# Altium PCB Thrust Stand + Wind Tunnel Controller.PcbDoc (part 1 of 2)
Units mm, origin at the board's own origin, x right, y up, seen from the top; angles counter-clockwise.
Board outline 72 x 57 mm, 4 copper layers (Top Layer, Layer 2 (GND), Layer 3 (GND/POW), Bottom Layer (SIG)), stack 0.346 mm thick; 155 components, 74 nets, 570 pads, 498 vias.
Unrouted connection lines stored in the file: 154.
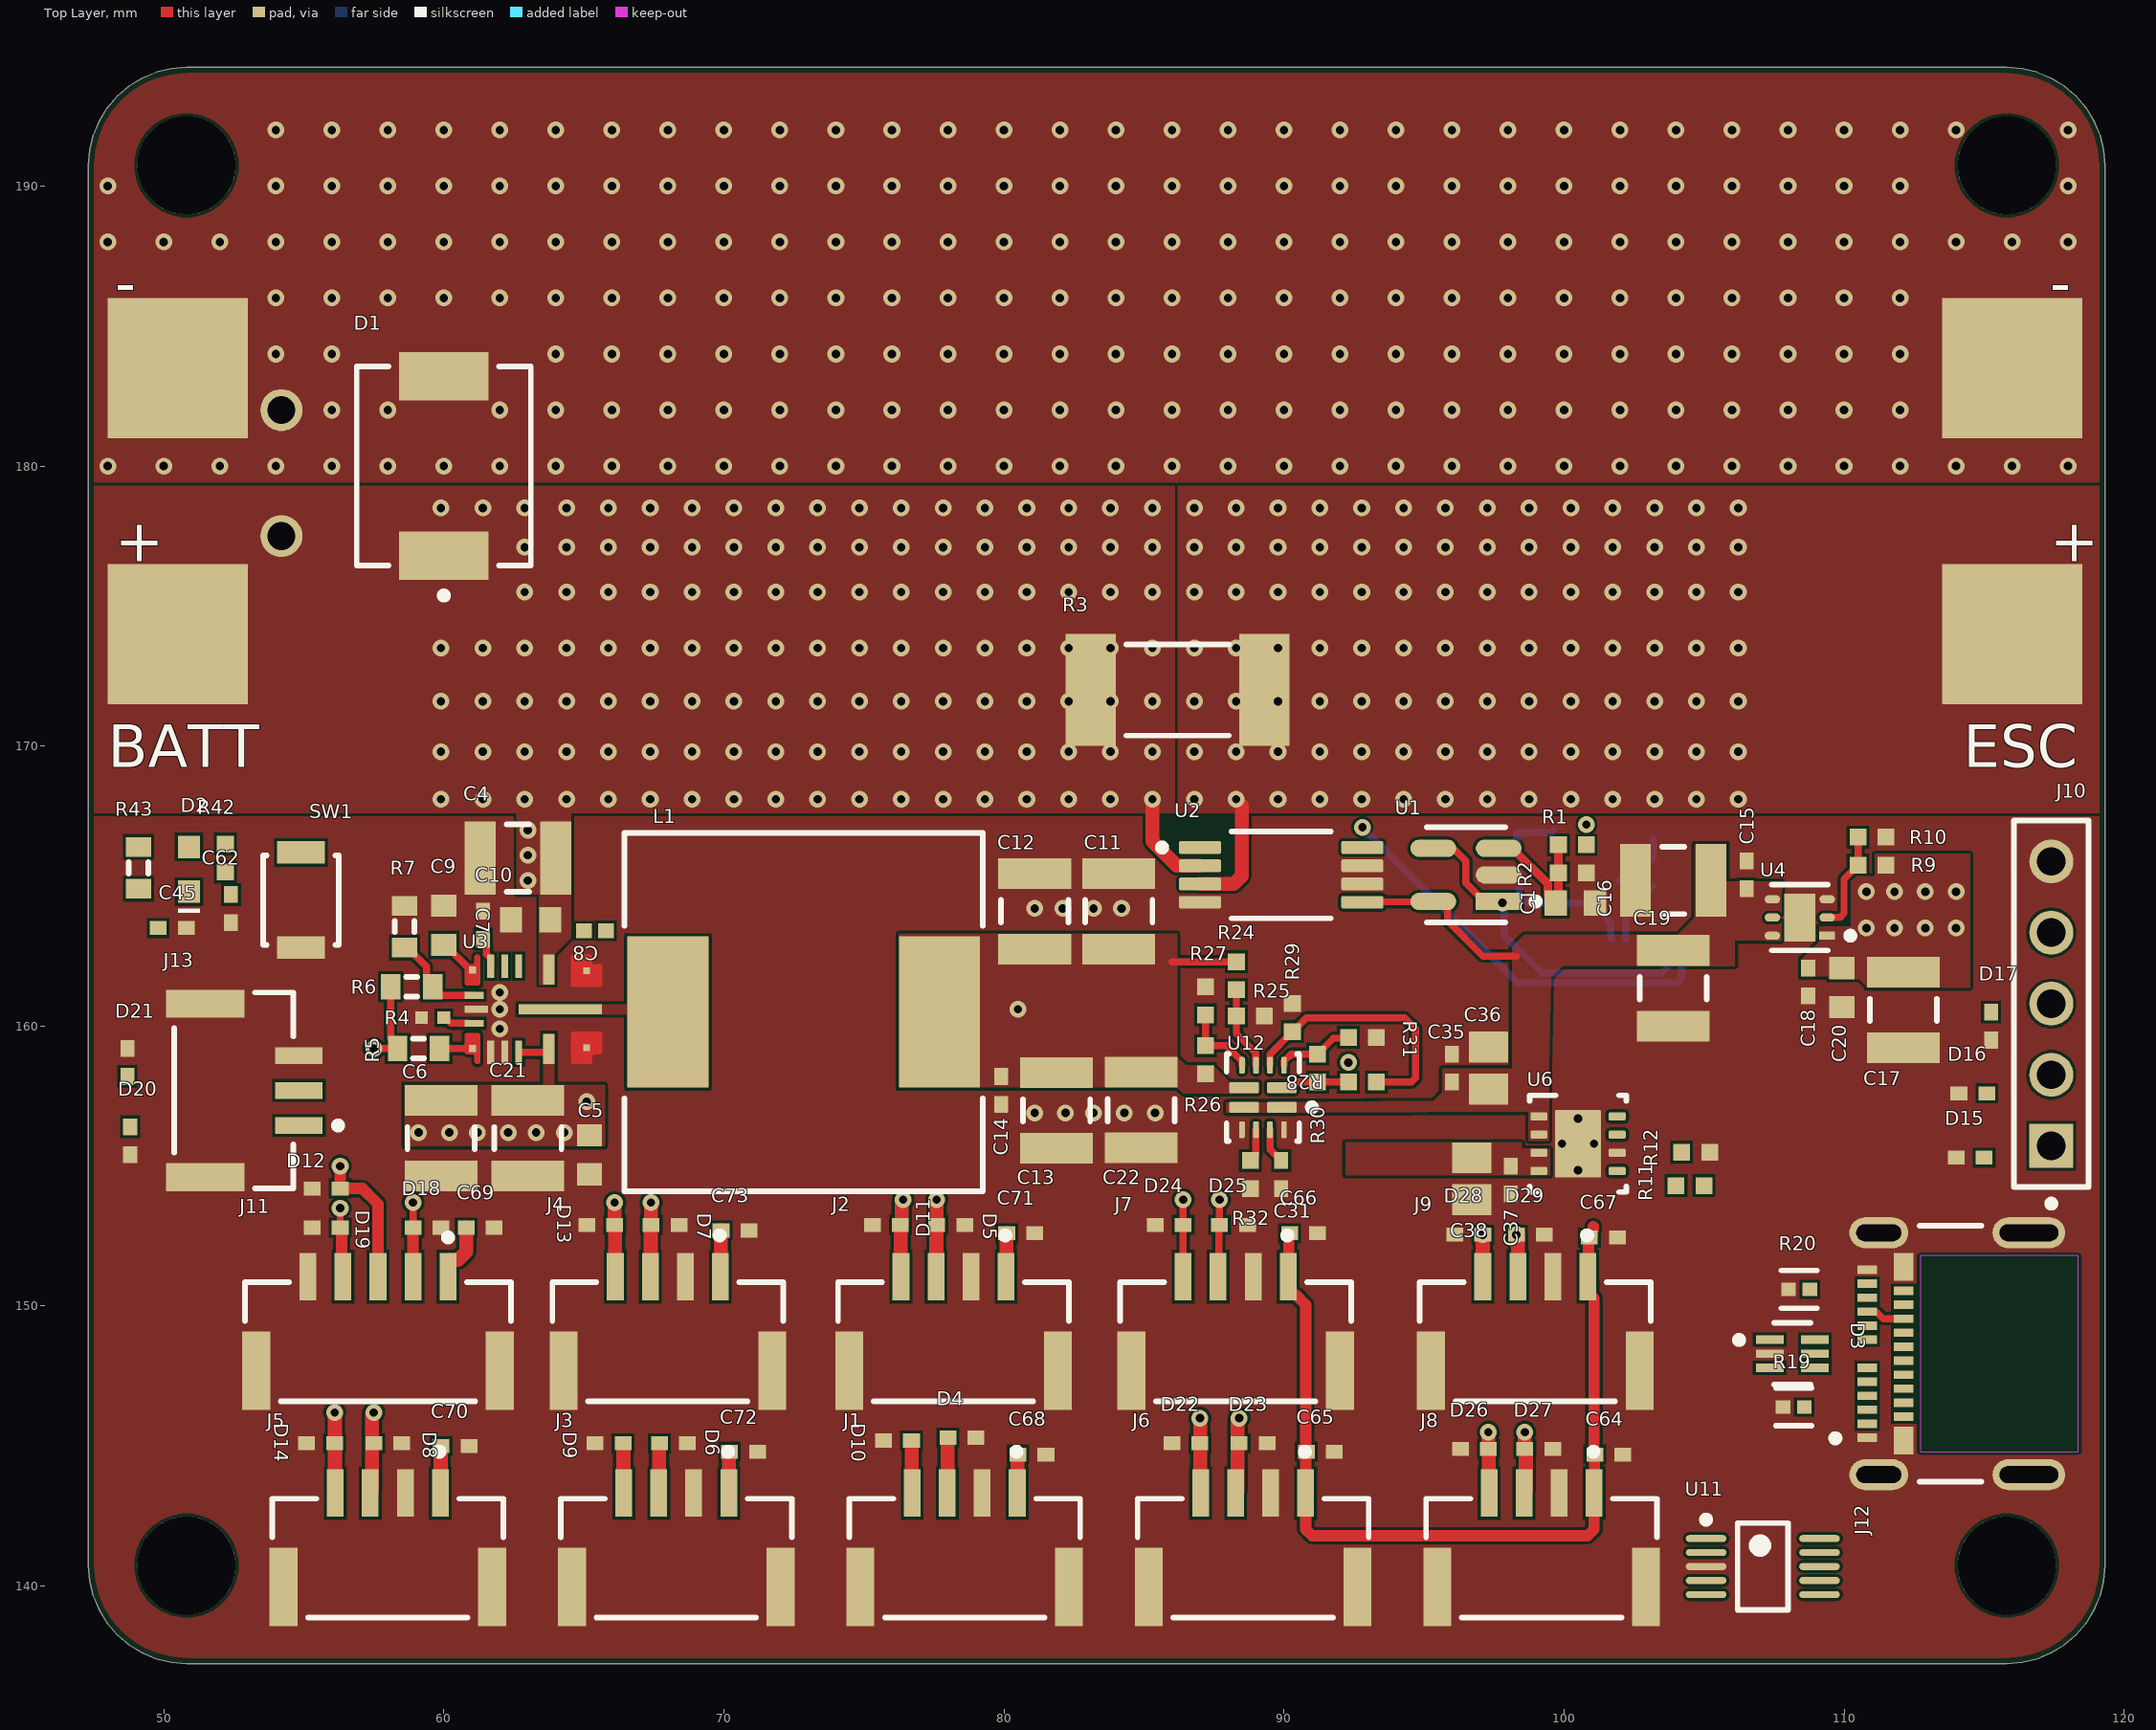
[diagram p0: Top Layer view]
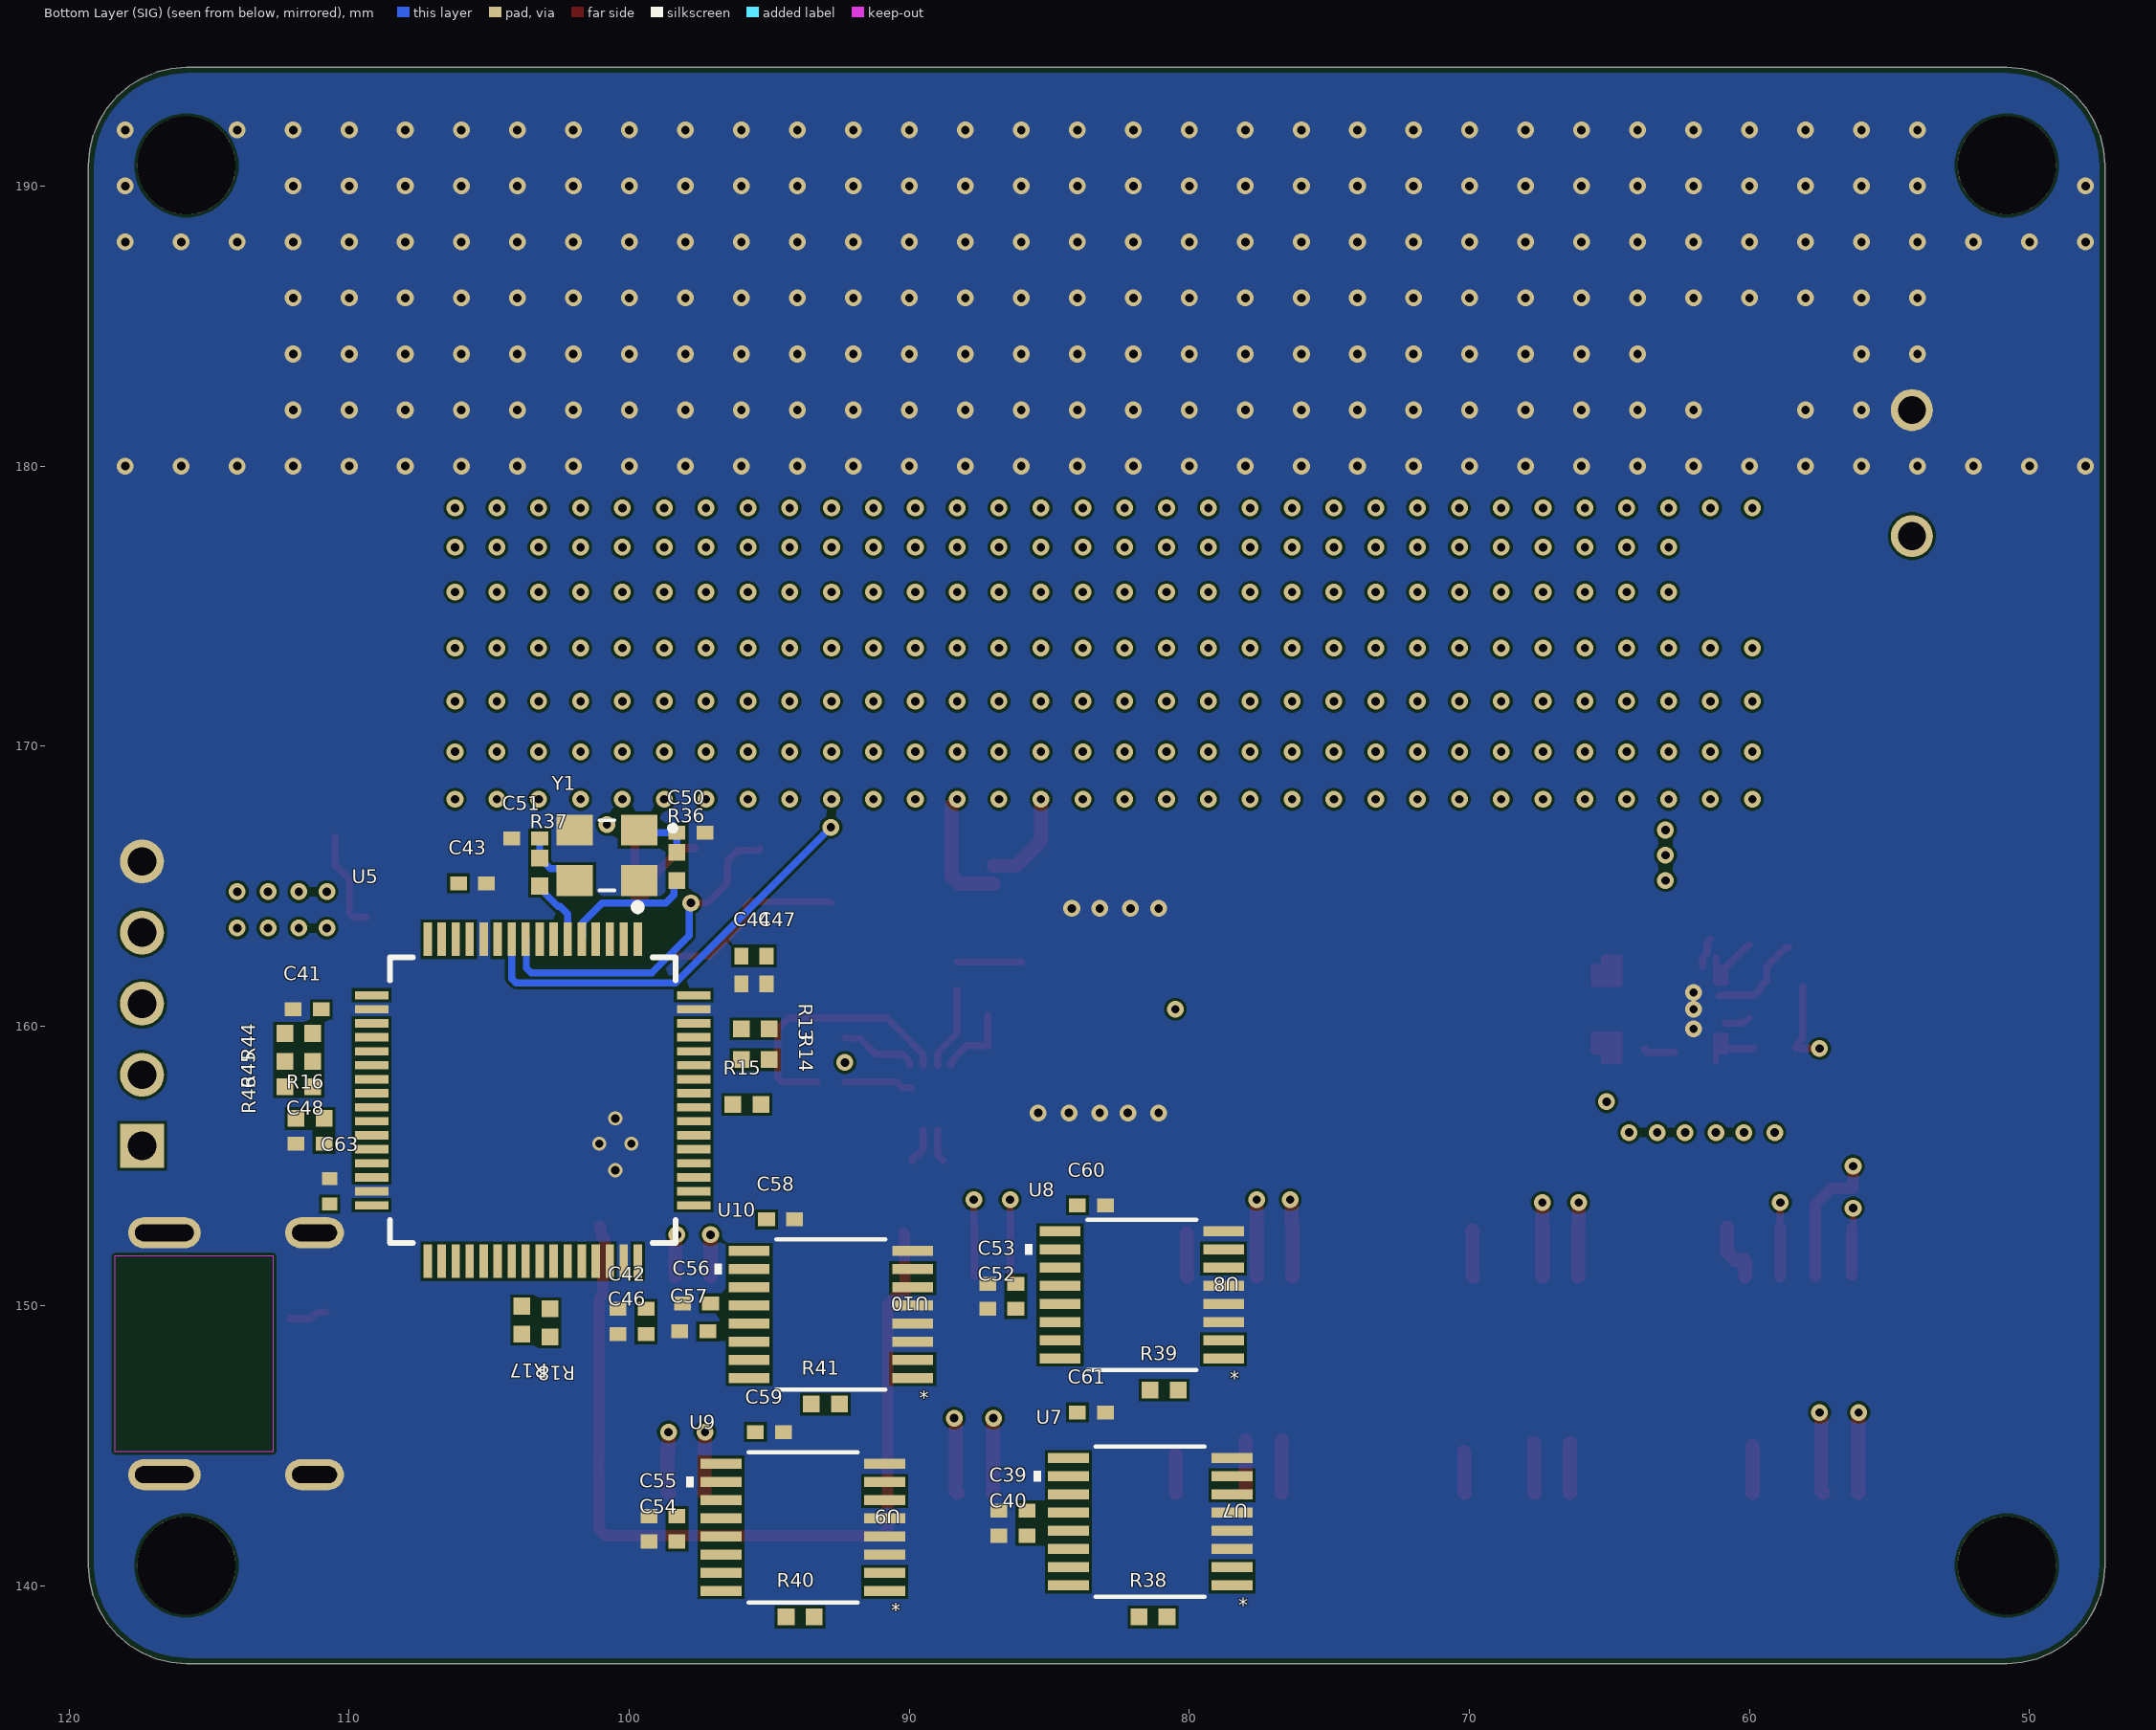
[diagram p1: Bottom Layer (SIG) view, seen from below]
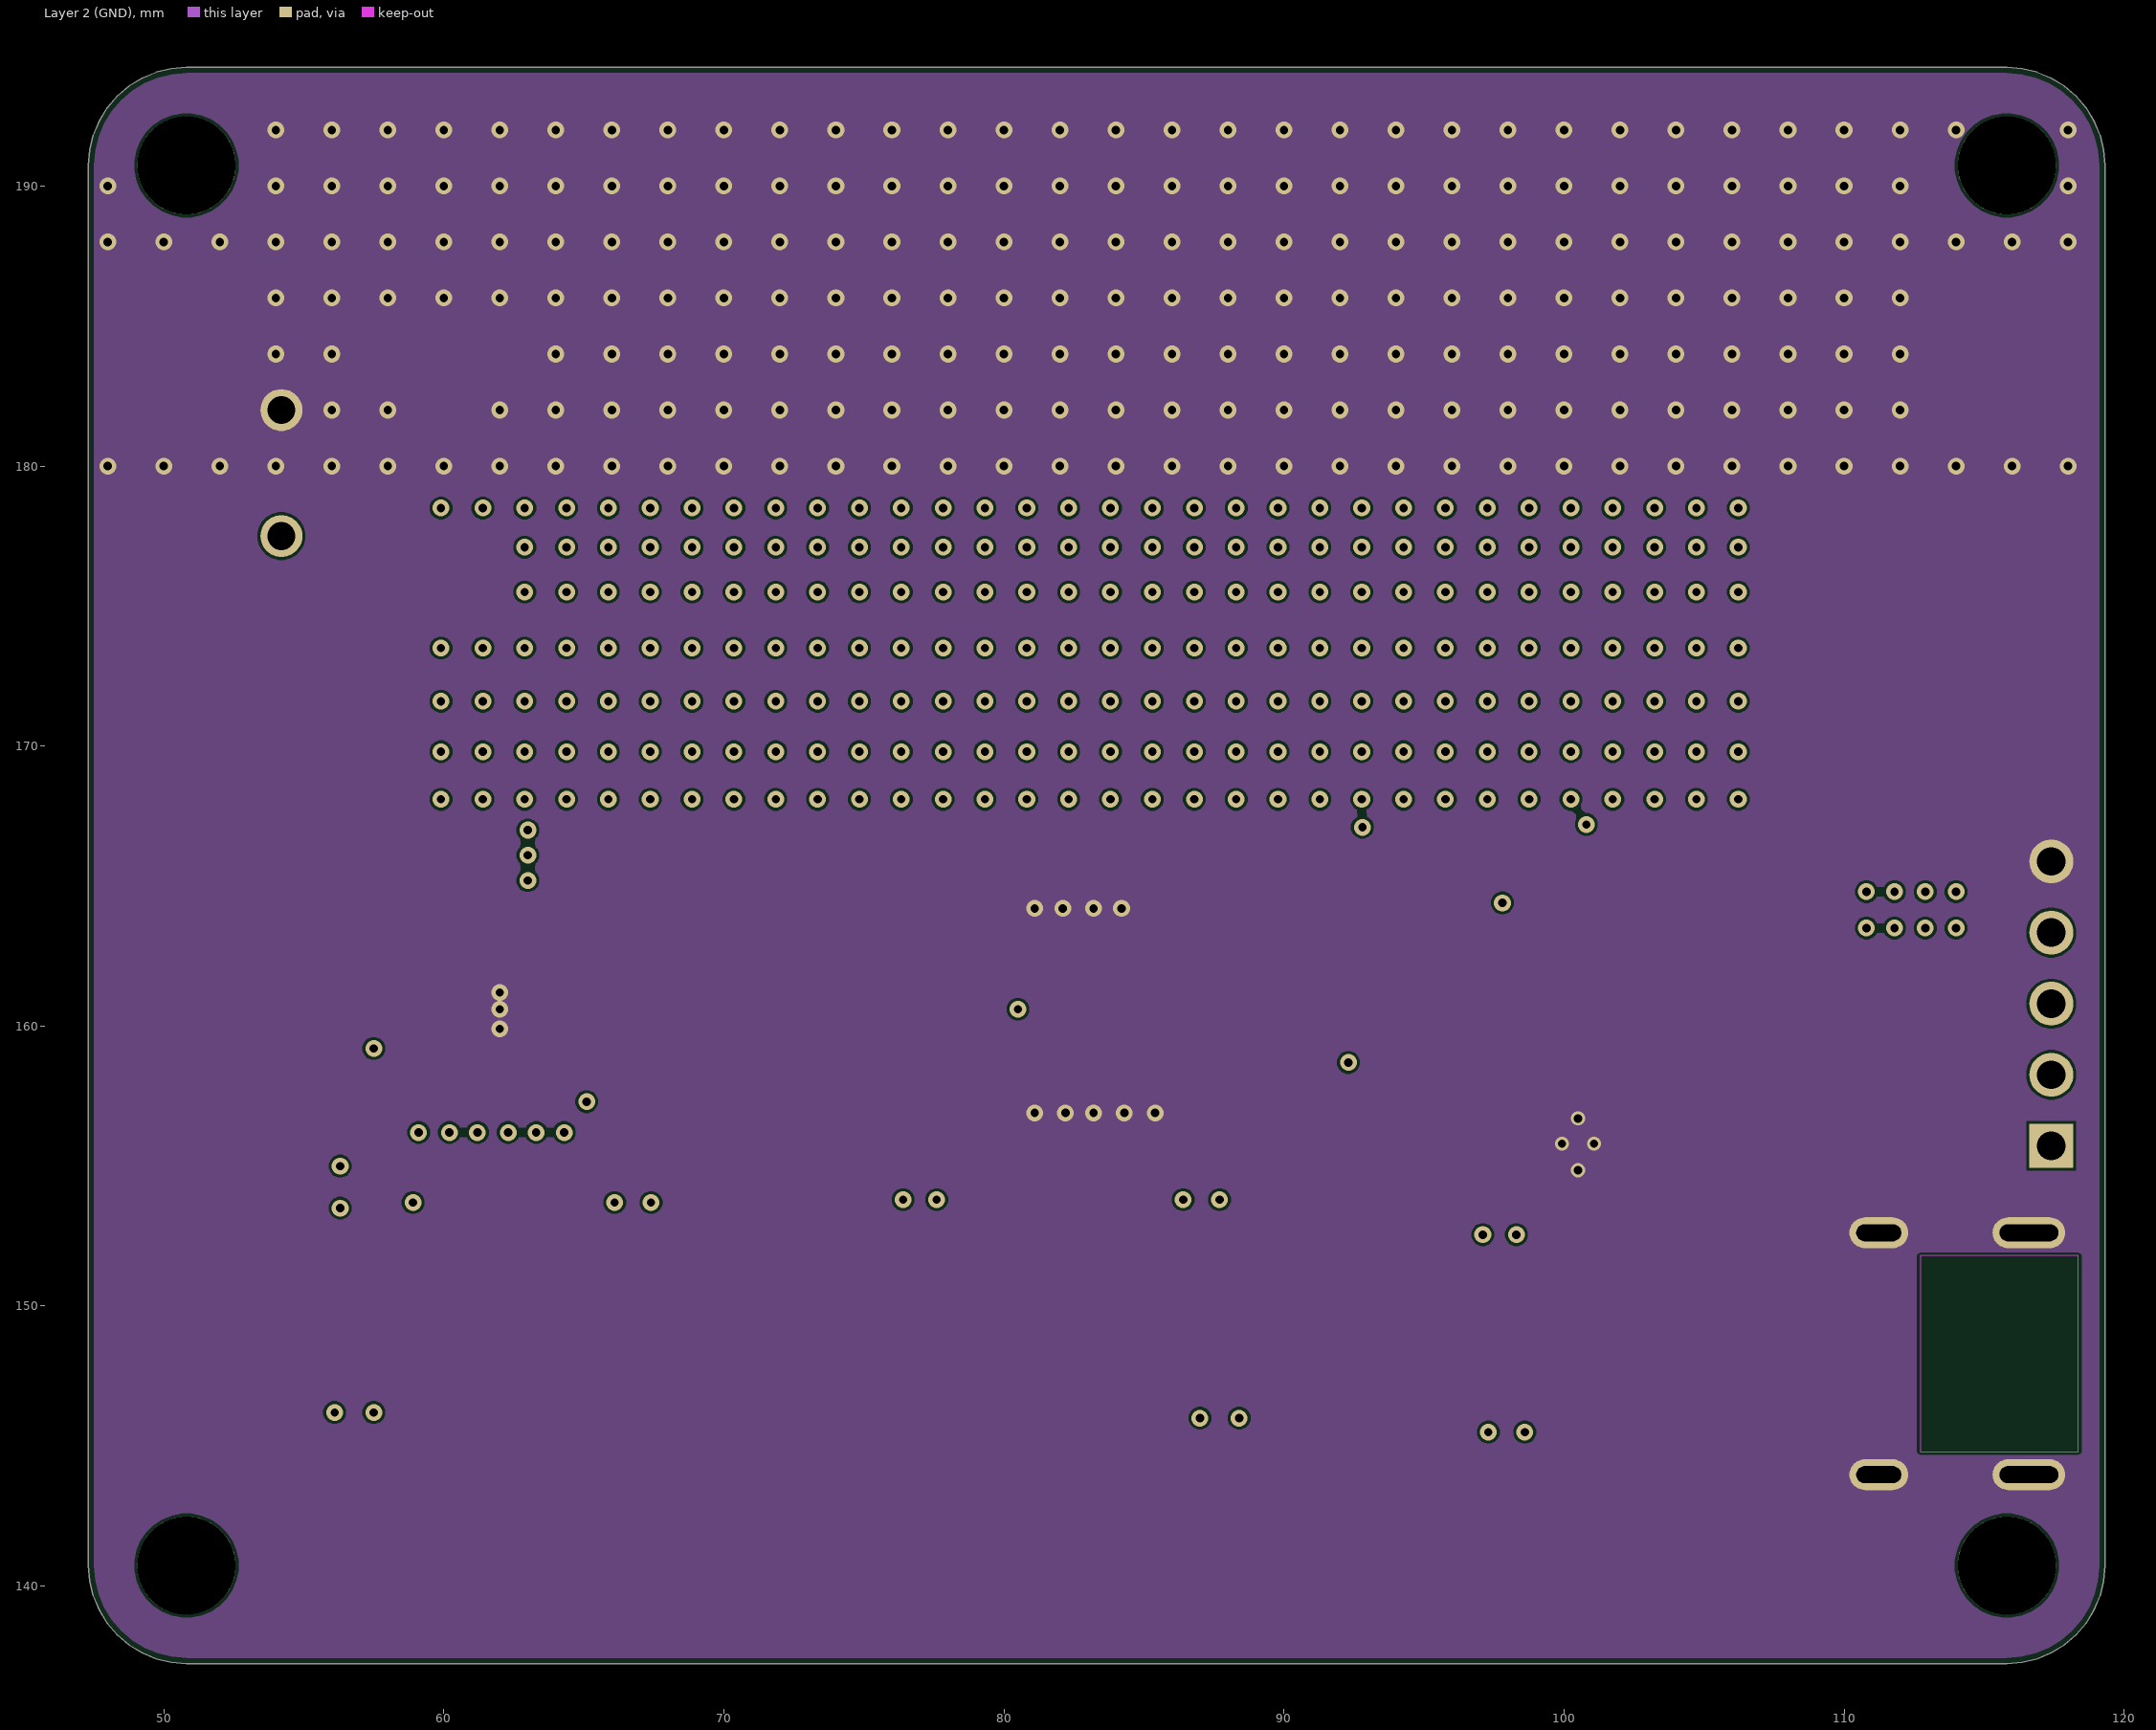
[diagram p2: Layer 2 (GND)]
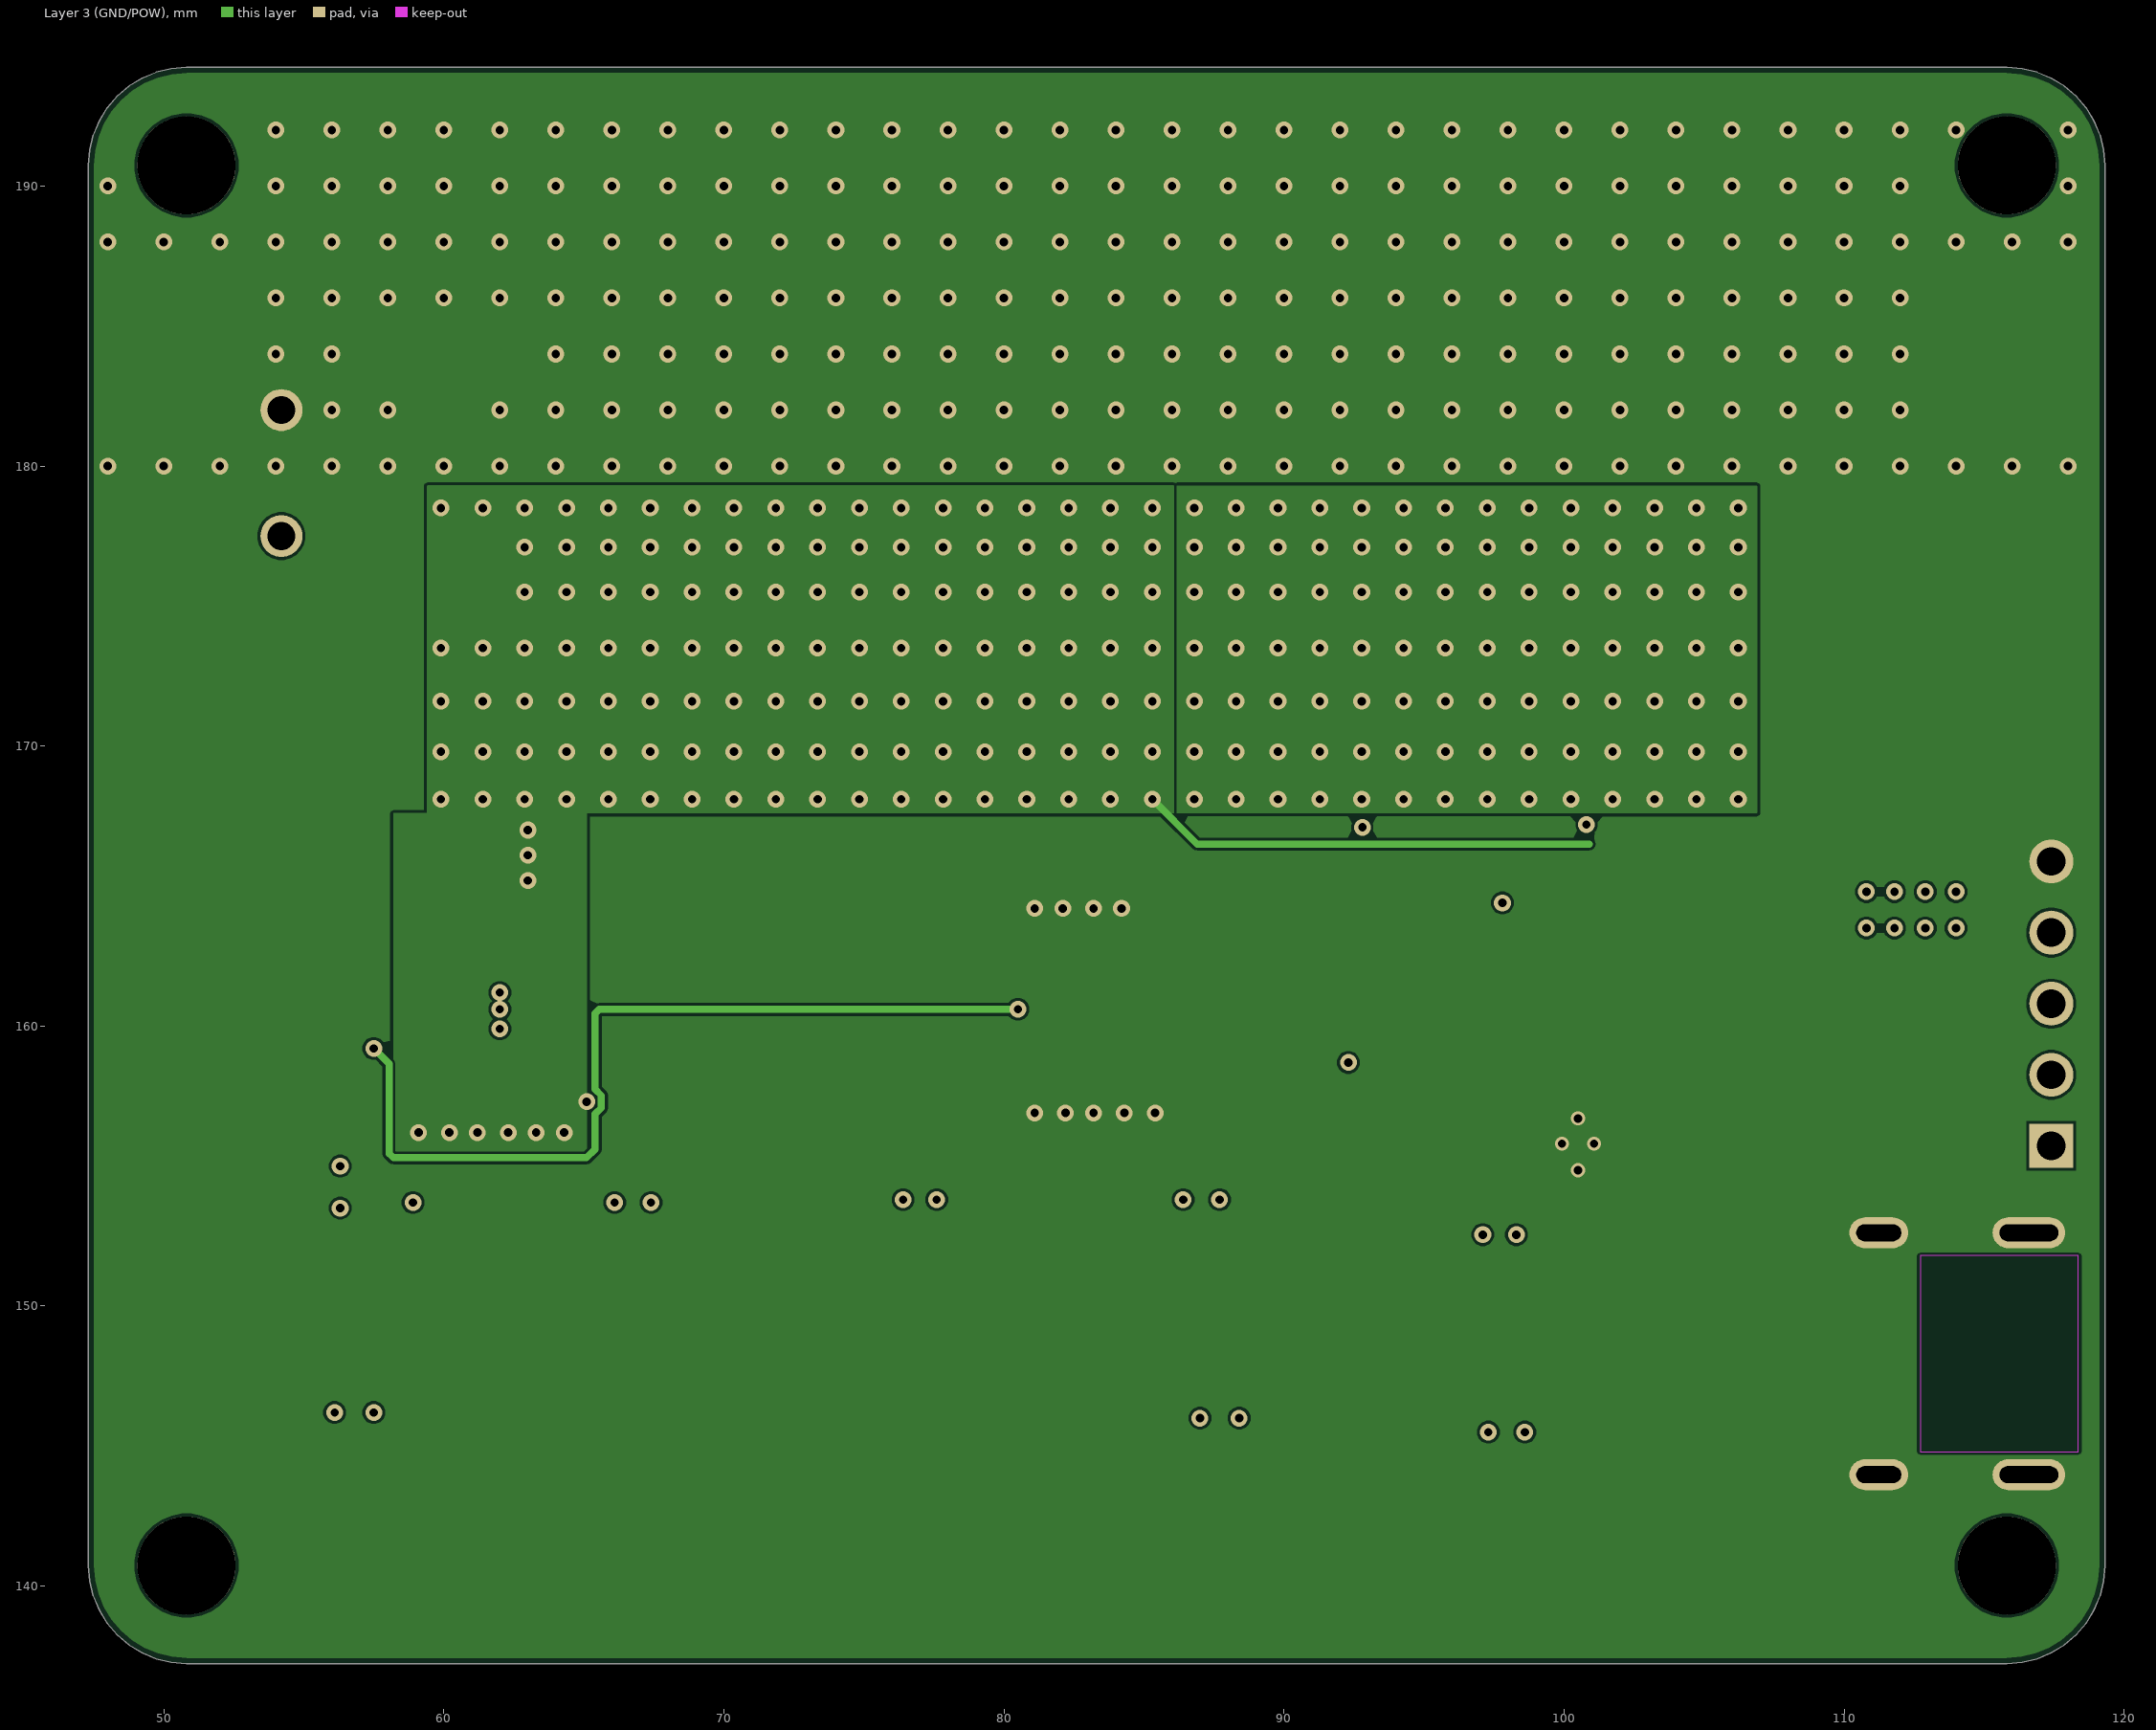
[diagram p3: Layer 3 (GND/POW)]

## Layer stack, top to bottom
Top Solder: solder mask 0.0102, Dk 3.5
Top Layer: signal copper 0.035
Dielectric 2: prepreg 0.0711, PP-006, Dk 4.1
Layer 2 (GND): signal copper 0.035
Dielectric 1: core 0.0635, Core-004, Dk 4.2
Layer 3 (GND/POW): signal copper 0.035
Dielectric 3: prepreg 0.0711, PP-006, Dk 4.1
Bottom Layer (SIG): signal copper 0.035
Bottom Solder: solder mask 0.0102, Dk 3.5

## Board outline
50.812,194.235 50.264,194.192 49.73,194.064 49.223,193.854 48.755,193.567 48.337,193.21 47.98,192.792 47.693,192.324 47.483,191.817 47.355,191.283 47.312,190.735 47.312,140.735 47.355,140.187 47.483,139.653 47.693,139.146 47.98,138.678 48.337,138.26 48.755,137.903 49.223,137.616 49.73,137.406 50.264,137.278 50.812,137.235 115.812,137.235 116.36,137.278 116.894,137.406 117.401,137.616 117.869,137.903 118.287,138.26 118.644,138.678 118.931,139.146 119.141,139.653 119.269,140.187 119.312,140.735 119.312,190.735 119.269,191.283 119.141,191.817 118.931,192.324 118.644,192.792 118.287,193.21 117.869,193.567 117.401,193.854 116.894,194.064 116.36,194.192 115.812,194.235

## Design rules (kind name [scope] priority, off if disabled: settings)
BoardOutlineClearance [All] p1: gap=0.2 ignorepadtopadclearanceinfootprint=FALSE
Clearance [All] p1: gap=0.1 ignorepadtopadclearanceinfootprint=FALSE
DiffPairsRouting [All] p1: maxlimit=0.254 minlimit=0.254 mostfreqgap=0.254 toplayer_minwidth=0.381 toplayer_maxwidth=0.381 toplayer_prefwidth=0.381 midlayer1_minwidth=0.381 midlayer1_maxwidth=0.381 midlayer1_prefwidth=0.381 midlayer2_minwidth=0.381 midlayer2_maxwidth=0.381 midlayer2_prefwidth=0.381 bottomlayer_minwidth=0.381 bottomlayer_maxwidth=0.381 bottomlayer_prefwidth=0.381 maxuncoupledlength=12.7
MinimumSolderMaskSliver [All] p1: minsoldermaskwidth=0.1
PlaneConnect [All] p1: planeconnectstyle=Direct reliefexpansion=0.508 reliefentries=4 reliefconductorwidth=0.254 reliefairgap=0.254
PolygonConnect [All] p1: connectstyle=Direct reliefconductorwidth=0.254 reliefentries=4 polygonreliefangle="90 Angle" airgapwidth=0.254
RoutingVias [All] p1: holewidth=0.711 width=1.27 viastyle="Through Hole" minholewidth=0.711 minwidth=1.27 maxholewidth=0.711 maxwidth=1.27
SolderMaskExpansion [All] p1: expansion=0 istentingtop=FALSE
SupplyNets "Schematic Supply Nets_1" [InNet('GND')] p1: voltage=0.000
SupplyNets "Schematic Supply Nets" [InNet('ESC_OUT')] p2: voltage=0.000
Width [All] p1: maxlimit=1.5 minlimit=0.254 preferedwidth=0.254
27 further rules are at their usual default settings.

## Classes and differential pairs
component class USB: C31 R24 R25 R26 R27 R28 R29 R30 R31 R32 U12
component class 4V3: C35 C36 C37 C38 R11 R12 U6
component class Output: C39 C40 C41 C42 C43 C44 C45 C46 C47 C48 C50 C51 C52 C53 C54 C55 C56 C57 C58 C59 C60 C61 C62 C63 C64 C65 C66 C67 C68 C69 C70 C71 C72 C73 D2 D4 D5 D6 D7 D8 D9 D10 D11 D12 D13 D14 D15 D16 D17 D18 D19 D20 D21 D22 D23 D24 D25 D26 D27 D28 D29 J1 J2 J3 J4 J5 J6 J7 J8 J9 J10 J11 J13 R13 R14 R15 R16 R17 R18 R36 R37 R38 R39 R40 R41 R42 R43 R44 R45 R46 SW1 U5 U7 U8 U9 U10 U11 Y1
component class 5V: "Buck Converter" C4 C5 C6 C7 C8 C9 C10 C11 C12 C13 C14 C21 C22 L1 R4 R5 R6 R7 U3
component class 3V3: C15 C16 C17 C18 C19 C20 R9 R10 U4
component class "BATT IN": C1 D1 R1 R2 R3 U1 U2
differential pair DOUT: +DOUT_P -DOUT_N
differential pair D: +D_P -D_N

## Components (designator, comment, footprint, x,y, rotation, side; value= is the part's Value field where it differs from the comment)
C1 "Cap Semi" 0603_CAPC1608L 100.4,164.4 r180 top value="15 µF"
C4 "10 µF" 1210_CAPC3225L 62.65,166 r180 top
C5 "1 µF" 0603_CAPC1608L 65.2,155.4 r270 top
C6 "10 µF" 1210_CAPC3225L 59.9,156 r270 top
C7 "1 µF" 0603_CAPC1608L 63.1,163.8 r180 top
C8 "GRM155R71A104KA01D" CAPC1005X55X25LL05T10 65.4,163.4 r180 top value=100nF
C9 "1 µF" 0603_CAPC1608L 60,163.6 r90 top
C10 "0.1 µF" 0402_CAPC1005L 61.4,163.6 r90 top
C11 "47 µF" 1210_CAPC3225L 84.1,164.1 r90 top
C12 "47 µF" 1210_CAPC3225L 81.1,164.1 r90 top
C13 "47 µF" 1210_CAPC3225L 81.882,156.99 r270 top
C14 "0.1 µF" 0402_CAPC1005L 79.9,157.7 r270 top
C15 "0.1 µF" 0402_CAPC1005L 106.521,165.4 r270 top
C16 "10 µF" 1210_CAPC3225L 103.9,165.2 r180 top
C17 "10 µF" 1210_CAPC3225L 112.119,160.577 r270 top
C18 "0.1 µF" 0402_CAPC1005L 108.719,161.577 r90 top
C19 "10 µF" 1210_CAPC3225L 103.9,161.35 r270 top
C20 "1 µF" 0603_CAPC1608L 109.919,161.377 r270 top
C21 "10 µF" 1210_CAPC3225L 63,156 r270 top
C22 "47 µF" 1210_CAPC3225L 84.9,157 r270 top
C31 "0.1 µF" 0402_CAPC1005L 89.9,154.7 r270 top
C35 "Cap Semi" 0402_CAPC1005L 96,158.5 r270 top value="100 nF"
C36 "Cap Semi" 0805_CAPC2012L 97.3,158.5 r270 top value="4.7 µF"
C37 "Cap Semi" 0402_CAPC1005L 98.1,154.5 r90 top value="100 nF"
C38 "Cap Semi" 0805_CAPC2012L 96.7,154.55 r90 top value="1 µF"
C39 "Cap Semi" 0402_CAPC1005L 86.3,142.7 r0 bottom value="100 nF"
C40 "Cap Semi" 0402_CAPC1005L 86.3,141.8 r0 bottom value="100 nF"
C41 "Cap Semi" 0402_CAPC1005L 111.5,160.6 r0 bottom value="100 nF"
C42 "Cap Semi" 0402_CAPC1005L 99.9,149.9 r0 bottom value="100 nF"
C43 "Cap Semi" 0402_CAPC1005L 105.6,165.1 r180 bottom value="100 nF"
C44 "Cap Semi" 0402_CAPC1005L 96,162 r270 bottom value="100 nF"
C45 "Cap Semi" 0402_CAPC1005L 50.3,163.5 r0 top value="100 nF"
C46 "Cap Semi" 0402_CAPC1005L 99.9,149 r0 bottom value="4.7 µF"
C47 "Cap Semi" 0402_CAPC1005L 95.1,162 r270 bottom value="1 µF"
C48 "Cap Semi" 0402_CAPC1005L 111.4,155.8 r0 bottom value="2.2 µF"
C50 "Cap Semi" 0402_CAPC1005L 97.8,166.9 r0 bottom value="18 pF"
C51 "Cap Semi" 0402_CAPC1005L 103.7,166.7 r0 bottom value="18 pF"
C52 "Cap Semi" 0402_CAPC1005L 86.7,149.9 r0 bottom value="100 nF"
C53 "Cap Semi" 0402_CAPC1005L 86.7,150.8 r0 bottom value="100 nF"
C54 "Cap Semi" 0402_CAPC1005L 98.8,141.593 r0 bottom value="100 nF"
C55 "Cap Semi" 0402_CAPC1005L 98.8,142.5 r0 bottom value="100 nF"
C56 "Cap Semi" 0402_CAPC1005L 97.6,150.1 r0 bottom value="100 nF"
C57 "Cap Semi" 0402_CAPC1005L 97.7,149.1 r0 bottom value="100 nF"
C58 "Cap Semi" 0402_CAPC1005L 94.6,153.1 r180 bottom value="100 nF"
C59 "Cap Semi" 0402_CAPC1005L 95,145.5 r180 bottom value="100 nF"
C60 "Cap Semi" 0402_CAPC1005L 83.5,153.6 r180 bottom value="100 nF"
C61 "Cap Semi" 0402_CAPC1005L 83.5,146.2 r180 bottom value="100 nF"
C62 "100 nF" 0402_CAPC1005L 52.4,164.2 r90 top
C63 "0.1uF" "IPC C C0402 NO SILK" 110.7,154.1 r270 bottom value=?F
C64 "Cap Semi" 0402_CAPC1005L 101.6,144.7 r0 top value="100 nF"
C65 "Cap Semi" 0402_CAPC1005L 91.3,144.8 r0 top value="100 nF"
C66 "Cap Semi" 0402_CAPC1005L 90.7,152.6 r0 top value="100 nF"
C67 "Cap Semi" 0402_CAPC1005L 101.406,152.45 r0 top value="100 nF"
C68 "Cap Semi" 0402_CAPC1005L 81,144.7 r0 top value="100 nF"
C69 "Cap Semi" 0402_CAPC1005L 61.3,152.8 r0 top value="100 nF"
C70 "Cap Semi" 0402_CAPC1005L 60.4,145 r0 top value="100 nF"
C71 "Cap Semi" 0402_CAPC1005L 80.6,152.6 r0 top value="100 nF"
C72 "Cap Semi" 0402_CAPC1005L 70.7,144.8 r0 top value="100 nF"
C73 "Cap Semi" 0402_CAPC1005L 70.4,152.7 r0 top value="100 nF"
D1 "1.5SMC30AHE3_A/H" FP-SMC-MFG 60,180 r90 top
D2 "150060VS75000" WL-SMCW_0603_150060xx75000 50.9,165.6 r90 top
D3 "USBLC6-2P6" FP-SOT-666-MFG 108.15,148.3 r0 top
D4 "ESD321DPYR" FP-DPY0002A-MFG 78.5,145.3 r0 top value=0.9pF
D5 "ESD321DPYR" FP-DPY0002A-MFG 78.1,152.9 r0 top value=0.9pF
D6 "ESD321DPYR" FP-DPY0002A-MFG 68.2,145.1 r0 top value=0.9pF
D7 "ESD321DPYR" FP-DPY0002A-MFG 67.9,152.9 r0 top value=0.9pF
D8 "ESD321DPYR" FP-DPY0002A-MFG 58,145.1 r0 top value=0.9pF
D9 "ESD321DPYR" FP-DPY0002A-MFG 65.9,145.1 r180 top value=0.9pF
D10 "ESD321DPYR" FP-DPY0002A-MFG 76.2,145.2 r180 top value=0.9pF
D11 "ESD321DPYR" FP-DPY0002A-MFG 75.8,152.9 r180 top value=0.9pF
D12 "ESD321DPYR" FP-DPY0002A-MFG 55.8,154.2 r180 top value=0.9pF
D13 "ESD321DPYR" FP-DPY0002A-MFG 65.6,152.9 r180 top value=0.9pF
D14 "ESD321DPYR" FP-DPY0002A-MFG 55.6,145.1 r180 top value=0.9pF
D15 "ESD321DPYR" FP-DPY0002A-MFG 114.5,155.3 r180 top value=0.9pF
D16 "ESD321DPYR" FP-DPY0002A-MFG 114.6,157.6 r180 top value=0.9pF
D17 "ESD321DPYR" FP-DPY0002A-MFG 115.25,160 r270 top value=0.9pF
D18 "ESD321DPYR" FP-DPY0002A-MFG 59.4,152.8 r0 top value=0.9pF
D19 "ESD321DPYR" FP-DPY0002A-MFG 55.8,152.8 r180 top value=0.9pF
D20 "ESD321DPYR" FP-DPY0002A-MFG 48.8,155.9 r270 top value=0.9pF
D21 "ESD321DPYR" FP-DPY0002A-MFG 48.7,158.7 r90 top value=0.9pF
D22 "SP0402U-ULC-01ETG" FP-DPY0002A-MFG 86.5,145.1 r180 top value=0.9pF
D23 "SP0402U-ULC-01ETG" FP-DPY0002A-MFG 88.9,145.1 r0 top value=0.9pF
D24 "SP0402U-ULC-01ETG" FP-DPY0002A-MFG 85.9,152.9 r180 top value=0.9pF
D25 "SP0402U-ULC-01ETG" FP-DPY0002A-MFG 88.2,152.9 r0 top value=0.9pF
D26 "SP0402U-ULC-01ETG" FP-DPY0002A-MFG 96.8,144.9 r180 top value=0.9pF
D27 "SP0402U-ULC-01ETG" FP-DPY0002A-MFG 99.1,144.9 r0 top value=0.9pF
D28 "SP0402U-ULC-01ETG" FP-DPY0002A-MFG 96.6,152.55 r180 top value=0.9pF
D29 "SP0402U-ULC-01ETG" FP-DPY0002A-MFG 98.8,152.55 r0 top value=0.9pF
J1 "BM04B-GHS-TBT(LF)(SN)" FP-BM04B-GHS-TBT_LF_SN-MFG 78.6,141 r0 top
J2 "BM04B-GHS-TBT(LF)(SN)" FP-BM04B-GHS-TBT_LF_SN-MFG 78.2,148.725 r0 top
J3 "BM04B-GHS-TBT(LF)(SN)" FP-BM04B-GHS-TBT_LF_SN-MFG 68.3,141 r0 top
J4 "BM04B-GHS-TBT(LF)(SN)" FP-BM04B-GHS-TBT_LF_SN-MFG 68,148.725 r0 top
J5 "BM04B-GHS-TBT(LF)(SN)" FP-BM04B-GHS-TBT_LF_SN-MFG 58,141 r0 top
J6 "BM04B-GHS-TBT(LF)(SN)" FP-BM04B-GHS-TBT_LF_SN-MFG 88.9,141 r0 top
J7 "BM04B-GHS-TBT(LF)(SN)" FP-BM04B-GHS-TBT_LF_SN-MFG 88.275,148.725 r0 top
J8 "BM04B-GHS-TBT(LF)(SN)" FP-BM04B-GHS-TBT_LF_SN-MFG 99.2,141 r0 top
J9 "BM04B-GHS-TBT(LF)(SN)" FP-BM04B-GHS-TBT_LF_SN-MFG 98.975,148.725 r0 top
J10 "TSW-105-22-G-S" FP-TSW-105-22-G-S-MFG 117.4,160.8 r90 top
J11 "BM05B-GHS-TBT (LF)(SN)(N)" FP-BM05B-GHS-TBT_LF_SN-MFG 57.65,148.725 r0 top
J12 "1054500101" FP-1054500101-MFG 114.6,148.3 r90 top
J13 "BM03B-GHS-TBT (LF)(SN)(N)" FP-BM03B-GHS-TBT_LF_SN-MFG 52.5,157.7 r270 top
L1 "SRR1260-150M" FP-SRR1260-MFG 72.85,160.5 r0 top value=15uH
R1 "Res Semi" 0402_RESC1005L 100.3,166.476 r0 top value=75k
R2 "Res Semi" 0402_RESC1005L 100.3,165.476 r180 top value=15k
R3 "SCMM2512S5-R001F" FP-AC2512-MFG 86.2,172 r0 top value=1mΩ
R4 "CRCW040252K3FKED" RESC1005X40X25LL05T05 59.6,160.3 r180 top
R5 "Res Semi" 0603_RESC1608L 59.1,159.2 r0 top value="100 kΩ"
R6 "Res Semi" 0603_RESC1608L 58.85,161.4 r180 top value="100 kΩ"
R7 "Res Semi" 0603_RESC1608L 58.6,163.55 r270 top value="24.9 kΩ"
R9 "Res Semi" 0402_RESC1005L 111,165.75 r0 top value="500 kΩ"
R10 "Res Semi" 0402_RESC1005L 111,166.75 r180 top value="160 kΩ"
R11 "Res Semi" 0402_RESC1005L 104.5,154.3 r0 top value="75.6 kΩ"
R12 "Res Semi" 0402_RESC1005L 104.7,155.5 r180 top value="30.1 kΩ"
R13 "Res Semi" 0402_RESC1005L 95.5,159.9 r180 bottom value=3.3k
R14 "Res Semi" 0402_RESC1005L 95.5,158.8 r180 bottom value=3.3k
R15 "Res Semi" 0402_RESC1005L 95.8,157.2 r180 bottom value=3.3k
R16 "Res Semi" 0402_RESC1005L 111.4,156.7 r0 bottom value=3.3k
R17 "Res Semi" 0402_RESC1005L 103.837,149.5 r270 bottom value=3.3k
R18 "Res Semi" 0402_RESC1005L 102.837,149.4 r270 bottom value=3.3k
R19 "MCWR04X5101FTL" FP-MCWR04-IPC_C 108.2,146.4 r180 top value=5.1kΩ
R20 "MCWR04X5101FTL" FP-MCWR04-IPC_C 108.4,150.6 r180 top value=5.1kΩ
R24 "Res Semi" 0402_RESC1005L 88.3,161.8 r90 top value="10 kΩ"
R25 "Res Semi" 0402_RESC1005L 88.8,160.357 r180 top value="5 kΩ"
R26 "Res Semi" 0402_RESC1005L 87.2,158.8 r270 top value="12 kΩ"
R27 "Res Semi" 0402_RESC1005L 87.2,160.9 r270 top value="5 kΩ"
R28 "Res Semi" 0402_RESC1005L 92.8,158 r180 top value="20 kΩ"
R29 "Res Semi" 0402_RESC1005L 90.3,160.3 r270 top value="5 kΩ"
R30 "Res Semi" 0402_RESC1005L 91.2,158.5 r270 top value="12 kΩ"
R31 "Res Semi" 0402_RESC1005L 92.8,159.6 r180 top value="4 kΩ"
R32 "Res Semi" 0402_RESC1005L 88.8,154.7 r90 top value="35.7 kΩ"
R36 "Res Semi" 0402_RESC1005L 98.3,165.7 r90 bottom value="0 Ω"
R37 "Res Semi" 0402_RESC1005L 103.2,165.5 r90 bottom value="220 Ω"
R38 "Res Semi" 0402_RESC1005L 81.3,138.9 r0 bottom value="10 kΩ"
R39 "Res Semi" 0402_RESC1005L 80.9,147 r0 bottom value="10 kΩ"
R40 "Res Semi" 0402_RESC1005L 93.9,138.9 r0 bottom value="10 kΩ"
R41 "Res Semi" 0402_RESC1005L 93,146.5 r0 bottom value="10 kΩ"
R42 "Res Semi" 0402_RESC1005L 52.2,166 r90 top value="10 kΩ"
R43 "Res Semi" 0603_RESC1608L 49.1,165.65 r90 top value="65 Ω"
R44 "Res Semi" 0402_RESC1005L 111.8,159.739 r0 bottom value="22 Ω"
R45 "Res Semi" 0402_RESC1005L 111.8,158.739 r0 bottom value="22 Ω"
R46 "Res Semi" 0402_RESC1005L 111.8,157.839 r0 bottom value="22 Ω"
SW1 "B3U-1000P" FP-B3U-1000P-MFG 54.9,164.5 r270 top
U1 "MCP6001T-I/OT" FP-C04-091-OT-IPC_A 96.5,165.4 r180 top
U2 "INA240A2PWR" FP-PW0008A-MFG 89.9,165.4 r0 top
U3 "LM61480RPHR" RPH0016A 63.2,160.6 r270 top
U4 "TLV76701DRVR" FP-DRV0006A-IPC_C 108.419,163.877 r180 top
U5 "STM32F446RET6" FP-LQFP64-5W-MFG 103.45,157.35 r270 bottom
U6 "TPS79501QDRBRQ1" DRB0008B_V 100.5,155.8 r0 top
U7 "ADS1220IPW" PW16 81.4,142.3 r0 bottom
U8 "ADS1220IPW" PW16 81.7,150.4 r0 bottom
U9 "ADS1220IPW" PW16 93.8,142.1 r0 bottom
U10 "ADS1220IPW" PW16 92.8,149.7 r0 bottom
U11 "CH340E" MSOP-UN10_L 107.1,140.7 r0 top
U12 "TPS2121RUXR" FP-RUX0012A-MFG 89.25,157.45 r180 top
Y1 "ECS-80-12-33-JGN-TR" XTAL_ECS-240-8-33-AGN-TR 100.8,166.1 r0 bottom

## Footprints (in the part's own frame and the unit in brackets; to place one, negate y for a bottom-side part, rotate by r counter-clockwise, add the part's x,y. Pads: shape width x height; smd on the part's side, far side on the other; paste and mask are expansions set on the pad)
0402_CAPC1005L [mm] "Chip Capacitor, Body 1.0x0.5mm, IPC High Density"
  rect 0.6x0.5 smd: 1(-0.5,0) 2(0.5,0)
  body extent -0.55,-0.3 0.55,0.3, height 0.5
0402_RESC1005L [mm] "Chip Resistor, Body 1.1x0.5mm, IPC High Density"
  rect 0.6x0.6 smd: 1(-0.5,0) 2(0.5,0)
  body extent -0.55,-0.3 0.55,0.3, height 0.32
0603_CAPC1608L [mm] "Chip Capacitor, Body 1.6x0.8mm, IPC High Density"
  rect 0.8x0.9 smd: 1(-0.7,0) 2(0.7,0)
  body extent -0.87,-0.48 0.87,0.48, height 0.8
0603_RESC1608L [mm] "Chip Resistor, Body 1.6x0.8mm, IPC High Density"
  rect 0.7x0.9 smd: 1(-0.75,0) 2(0.75,0)
  silkscreen extent -0.2,-0.35 0.2,0.35, body extent -0.85,-0.48 0.85,0.48, height 0.9
0805_CAPC2012L [mm] "Chip Capacitor, Body 2.0x1.3mm, IPC High Density"
  rect 1.1x1.4 smd: 1(-0.75,0) 2(0.75,0)
  body extent -1.1,-0.72 1.1,0.72, height 1.25
1210_CAPC3225L [mm] "Chip Capacitor, Body 3.2x2.5mm, IPC High Density"
  rect 1.1x2.6 smd: 1(-1.35,0) 2(1.35,0)
  silkscreen extent -0.4,-1.2 0.4,1.2, body extent -1.7,-1.35 1.7,1.35, height 1.5
CAPC1005X55X25LL05T10 [mm] "Chip Capacitor, 2-Leads, Body 1.05x0.55mm, IPC High Density"
  rect 0.56x0.52 smd: 1(-0.39,0) 2(0.39,0)
  body extent -0.53,-0.28 0.53,0.28, height 0.55
DRB0008B_V [mm] "SON, 8-Leads, Body 3x3mm, Pitch 0.65mm, Thermal Pad 2.4x1.65mm, TI Recommended"
  rrect33% 0.6x0.3 smd: 1(-1.4,0.975) 2(-1.4,0.325) 3(-1.4,-0.325) 4(-1.4,-0.975) 5(1.4,-0.975) 6(1.4,-0.325) 7(1.4,0.325) 8(1.4,0.975)
  rrect6% 1.65x2.4 smd paste-1.2: 9(0,0)
  silkscreen extent -1.73,-1.73 1.73,1.73, body extent -1.5,-1.5 1.5,1.5, height 0.96
FP-1054500101-MFG [mm]
  rrect100% 1.1x2.1 hole 1.6 slot 0.6 at 0 deg paste-2539.97 mask+0: 1(-4.32,3.36) 2(4.32,3.36)
  rrect100% 1.1x2.6 hole 2.1 slot 0.6 at 0 deg paste-2539.97 mask+0: 3(-4.32,-2) 4(4.32,-2)
  rect 0.3x0.7 smd paste+0 mask+0: A1(-3,3.77) A2(-2.5,3.77) A3(-2,3.77) A4(-1.5,3.77) A5(-1,3.77) A6(-0.5,3.77) A7(0.5,3.77) A8(1,3.77) A9(1.5,3.77) A10(2,3.77) A11(2.5,3.77) A12(3,3.77) B2(2.25,2.47) B3(1.75,2.47) B4(1.25,2.47) B5(0.75,2.47) B6(0.25,2.47) B7(-0.25,2.47) B8(-0.75,2.47) B9(-1.25,2.47) B10(-1.75,2.47) B11(-2.25,2.47)
  rect 1x0.7 smd paste+0 mask+0: B1(3.1,2.47) B12(-3.1,2.47)
  Keep-Out Layer region: -3.5,-3.77 3.5,-3.77 3.5,1.88 -3.5,1.88
  silkscreen extent -4.57,-0.3 4.57,5.03
FP-AC2512-MFG [mm]
  rect 1.8x4 smd paste+0 mask+0: 1(-3.1,0) 2(3.1,0)
  silkscreen extent -1.83,-1.63 1.83,1.63, body extent -4.1,-2.1 4.1,2.1, height 0.25
FP-B3U-1000P-MFG [mm]
  rect 0.8x1.7 smd paste+0 mask+0: 1(-1.7,0) 2(1.7,0)
  silkscreen extent -1.6,-1.35 1.6,1.35, body extent -2,-1.26 2,1.24, height 1.6
FP-BM03B-GHS-TBT_LF_SN-MFG [mm]
  rect 0.6x1.7 smd paste+0 mask+0: 1(1.25,2.325) 2(0,2.325) 3(-1.25,2.325)
  rect 1x2.8 smd paste+0 mask+0: 4(-3.1,-1.025) 5(3.1,-1.025)
  silkscreen extent -3.5,-2.12 3.5,3.85, body extent -3.7,-2.52 3.7,3.27, height 0.25
FP-BM04B-GHS-TBT_LF_SN-MFG [mm]
  rect 0.6x1.7 smd paste+0 mask+0: 1(1.875,2.325) 2(0.625,2.325) 3(-0.625,2.325) 4(-1.875,2.325)
  rect 1x2.8 smd paste+0 mask+0: 5(-3.725,-1.025) 6(3.725,-1.025)
  silkscreen extent -4.13,-2.12 4.13,3.92, body extent -4.33,-2.52 4.33,3.27, height 0.25
FP-BM05B-GHS-TBT_LF_SN-MFG [mm]
  rect 0.6x1.7 smd paste+0 mask+0: 1(2.5,2.325) 2(1.25,2.325) 3(0,2.325) 4(-1.25,2.325) 5(-2.5,2.325)
  rect 1x2.8 smd paste+0 mask+0: 6(-4.35,-1.025) 7(4.35,-1.025)
  silkscreen extent -4.75,-2.12 4.75,3.85, body extent -4.95,-2.52 4.95,3.27, height 0.25
FP-C04-091-OT-IPC_A [mil]
  rect 64.5x24.33 smd paste+0 mask+0: 1(-45.91,37.4)
  rrect100% 64.5x24.33 smd paste+0 mask+0: 2(-45.91,0) 3(-45.91,-37.4) 4(45.91,-37.4) 5(45.91,37.4)
  silkscreen extent -103,-67 55,67
FP-DPY0002A-MFG [mm]
  rect 0.6x0.5 smd paste+0 mask+0: 1(-0.5,0) 2(0.5,0)
  body extent -0.9,-0.45 0.9,0.45, height 0.25
FP-DRV0006A-IPC_C [mm]
  rect 0.556x0.292 smd paste+0 mask+0: 1(-0.978,0.65)
  rrect100% 0.556x0.292 smd paste+0 mask+0: 2(-0.978,0) 3(-0.978,-0.65) 4(0.978,-0.65) 5(0.978,0) 6(0.978,0.65)
  rect 1.1x1.7 smd paste-1000 mask+0: 7(0,0)
  silkscreen extent -1.93,-1.17 1,1.17, body extent -1.36,-1.1 1.36,1.1, height 0.25
FP-LQFP64-5W-MFG [mm]
  rect 1.2x0.3 smd paste+0 mask+0: 1(-5.75,3.75) 2(-5.75,3.25) 3(-5.75,2.75) 4(-5.75,2.25) 5(-5.75,1.75) 6(-5.75,1.25) 7(-5.75,0.75) 8(-5.75,0.25) 9(-5.75,-0.25) 10(-5.75,-0.75) 11(-5.75,-1.25) 12(-5.75,-1.75) 13(-5.75,-2.25) 14(-5.75,-2.75) 15(-5.75,-3.25) 16(-5.75,-3.75) 33(5.75,-3.75) 34(5.75,-3.25) 35(5.75,-2.75) 36(5.75,-2.25) 37(5.75,-1.75) 38(5.75,-1.25) 39(5.75,-0.75) 40(5.75,-0.25) 41(5.75,0.25) 42(5.75,0.75) 43(5.75,1.25) 44(5.75,1.75) 45(5.75,2.25) 46(5.75,2.75) 47(5.75,3.25) 48(5.75,3.75)
  rect 0.3x1.2 smd paste+0 mask+0: 17(-3.75,-5.75) 18(-3.25,-5.75) 19(-2.75,-5.75) 20(-2.25,-5.75) 21(-1.75,-5.75) 22(-1.25,-5.75) 23(-0.75,-5.75) 24(-0.25,-5.75) 25(0.25,-5.75) 26(0.75,-5.75) 27(1.25,-5.75) 28(1.75,-5.75) 29(2.25,-5.75) 30(2.75,-5.75) 31(3.25,-5.75) 32(3.75,-5.75) 49(3.75,5.75) 50(3.25,5.75) 51(2.75,5.75) 52(2.25,5.75) 53(1.75,5.75) 54(1.25,5.75) 55(0.75,5.75) 56(0.25,5.75) 57(-0.25,5.75) 58(-0.75,5.75) 59(-1.25,5.75) 60(-1.75,5.75) 61(-2.25,5.75) 62(-2.75,5.75) 63(-3.25,5.75) 64(-3.75,5.75)
  silkscreen extent -7.02,-5.1 5.1,5.1
FP-MCWR04-IPC_C [mm]
  rect 0.515x0.472 smd paste+0 mask+0: 1(-0.379,0) 2(0.379,0)
  silkscreen extent -0.64,-0.67 0.64,0.67, body extent -0.74,-0.38 0.74,0.38, height 0.25
FP-PW0008A-MFG [mm]
  rrect22% 1.5x0.45 smd paste+0 mask+0: 1(-2.9,0.975) 2(-2.9,0.325) 3(-2.9,-0.325) 4(-2.9,-0.975) 5(2.9,-0.975) 6(2.9,-0.325) 7(2.9,0.325) 8(2.9,0.975)
  silkscreen extent -4.37,-1.55 1.78,1.55, body extent -3.75,-1.8 3.75,1.8, height 0.25
FP-RUX0012A-MFG [mm]
  rrect25% 1.05x0.4 smd paste+0 mask+0: 1(-0.675,0.35) 2(-0.675,-0.35) 7(0.675,-0.35) 8(0.675,0.35)
  rrect50% 0.2x0.6 smd paste+0 mask+0: 3(-0.75,-1.15) 4(-0.25,-1.15) 5(0.25,-1.15) 6(0.75,-1.15) 9(0.75,1.15) 10(0.25,1.15) 11(-0.25,1.15) 12(-0.75,1.15)
  silkscreen extent -1.88,-1.55 1.3,1.55, body extent -1.3,-1.55 1.3,1.55, height 0.25
FP-SMC-MFG [mm]
  rect 1.72x3.2 smd paste+0 mask+0: 1(-3.205,0) 2(3.205,0)
  silkscreen extent -4.75,-3.11 3.55,3.11, body extent -4.17,-3.21 4.17,3.21, height 0.25
FP-SOT-666-MFG [mm]
  rect 0.99x0.3 smd paste+0 mask+0: 1(-0.805,0.5) 2(-0.805,0) 3(-0.805,-0.5) 4(0.805,-0.5) 5(0.805,0) 6(0.805,0.5)
  silkscreen extent -2.02,-1.1 0.65,1.1, body extent -0.8,-0.8 0.8,0.8, height 0.6
FP-SRR1260-MFG [mm]
  rect 2.9x5.4 smd paste+0 mask+0: 1(-4.85,0) 2(4.85,0)
  silkscreen extent -6.4,-6.4 6.4,6.4, body extent -6.5,-6.5 6.5,6.5, height 0.25
FP-TSW-105-22-G-S-MFG [mm]
  rect 1.57x1.57 hole 1.02 paste-2539.97 mask+0: 1(-5.08,0)
  round 1.57 hole 1.02 paste-2539.97 mask+0: 2(-2.54,0) 3(0,0) 4(2.54,0) 5(5.08,0)
  silkscreen extent -7.26,-1.34 6.54,1.34, body extent -6.48,-1.27 6.35,1.27, height 8.71
"IPC C C0402 NO SILK" [mm] "Chip Capacitor, 2-Leads, Body 1.02x0.51mm, IPC High Density"
  rect 0.46x0.54 smd: 1(-0.46,0) 2(0.46,0)
  body extent -0.51,-0.26 0.51,0.25, height 0.51
MSOP-UN10_L [mm] "TSSOP, 10-Leads, Body 3x3mm, Pitch 0.5mm, IPC High Density"
  oval 1.45x0.25 smd: 1(-2.025,1) 2(-2.025,0.5) 3(-2.025,0) 4(-2.025,-0.5) 5(-2.025,-1) 6(2.025,-1) 7(2.025,-0.5) 8(2.025,0) 9(2.025,0.5) 10(2.025,1)
  silkscreen extent -2.15,-1.55 0.9,1.8, body extent -1.55,-1.55 1.55,1.55, height 1.1
PW16 [mm]
  rect 1.462x0.355 smd paste+0 mask+0: 1(-2.921,2.275) 2(-2.921,1.625) 3(-2.921,0.975) 4(-2.921,0.325) 5(-2.921,-0.325) 6(-2.921,-0.975) 7(-2.921,-1.625) 8(-2.921,-2.275) 9(2.921,-2.275) 10(2.921,-1.625) 11(2.921,-0.975) 12(2.921,-0.325) 13(2.921,0.325) 14(2.921,0.975) 15(2.921,1.625) 16(2.921,2.275)
  silkscreen extent -1.95,-2.68 4.16,2.68, body extent -3.3,-2.55 3.3,2.55, height 1.2
RESC1005X40X25LL05T05 [mm] "Chip Resistor, 2-Leads, Body 1.00x0.50mm, IPC High Density"
  rect 0.45x0.45 smd: 1(-0.4,0) 2(0.4,0)
  body extent -0.53,-0.27 0.53,0.28, height 0.4
RPH0016A [mm]
  rect 0.25x0.25 smd paste-0.112 mask+0.051: 1(-1.375,1.9) 6(-1.4,-2.175) 10(1.4,-2.175) 15(1.375,1.9)
  rect 1.075x0.4 smd paste+0 mask+0.051: 2(-1.413,0.55) 14(1.413,0.55)
  rect 0.825x0.25 smd paste+0 mask+0.051: 3(-1.538,-0.525) 4(-1.538,-1.025) 5(-1.538,-1.525) 11(1.538,-1.525) 12(1.538,-1.025) 13(1.538,-0.525)
  rect 0.25x0.675 smd paste+0 mask+0.051: 7(-0.5,-2.113) 9(0.5,-2.113)
  rect 0.25x0.825 smd paste+0 mask+0.051: 8(0,-2.038)
  rect 0.35x2.975 smd paste+0 mask+0.051: 16(0,0.963)
  Top Layer region: -1.9,1.35 -1.95,1.4 -1.95,2.05 -1.9,2.1 -1.65,2.1 -1.6,2.15 -1.6,2.4 -1.55,2.45 -0.85,2.45 -0.8,2.4 -0.8,1.4 -0.85,1.35
  Top Layer region: 1.9,1.35 1.95,1.4 1.95,2.05 1.9,2.1 1.65,2.1 1.6,2.15 1.6,2.4 1.55,2.45 0.85,2.45 0.8,2.4 0.8,1.4 0.85,1.35
  Top Layer region: 1.95,-1.95 1.95,-2.05 1.9,-2.1 1.65,-2.1 1.6,-2.15 1.6,-2.4 1.55,-2.45 0.9,-2.45 0.85,-2.4 0.85,-1.95 0.9,-1.9 1.9,-1.9
  Top Layer region: -1.95,-1.95 -1.95,-2.05 -1.9,-2.1 -1.65,-2.1 -1.6,-2.15 -1.6,-2.4 -1.55,-2.45 -0.9,-2.45 -0.85,-2.4 -0.85,-1.95 -0.9,-1.9 -1.9,-1.9
WL-SMCW_0603_150060xx75000 [mm] "SMD Mono-color Chip LED, body 1.60 x 0.80 mm"
  rect 0.8x0.8 smd: 1(-0.8,0) 2(0.8,0)
  silkscreen extent -1.55,-0.4 -1.4,0.4, body extent -0.8,-0.4 0.8,0.4, height 0.7
XTAL_ECS-240-8-33-AGN-TR [mm]
  rect 1.3x1.1 smd: 1(-1.15,-0.9) 2(1.15,-0.9) 3(1.15,0.9) 4(-1.15,0.9)
  silkscreen extent -2.45,-1.25 0.27,1.25, body extent -1.6,-1.25 1.6,1.25, height 0.8